# EAGLE board DualSerialHBridge-2.0 (EAGLE 6.4)
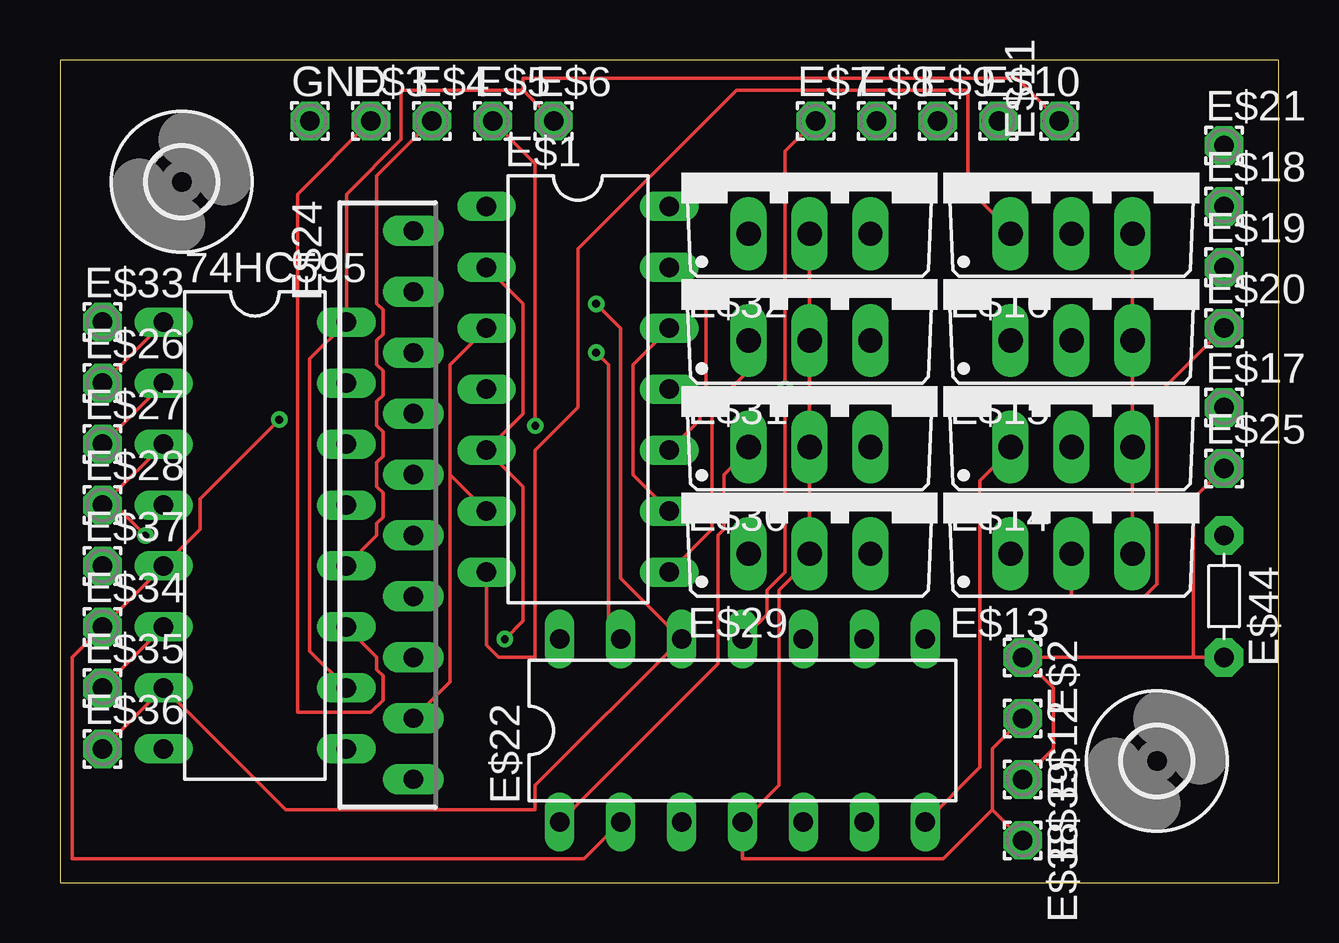
[diagram p0: board, top side]
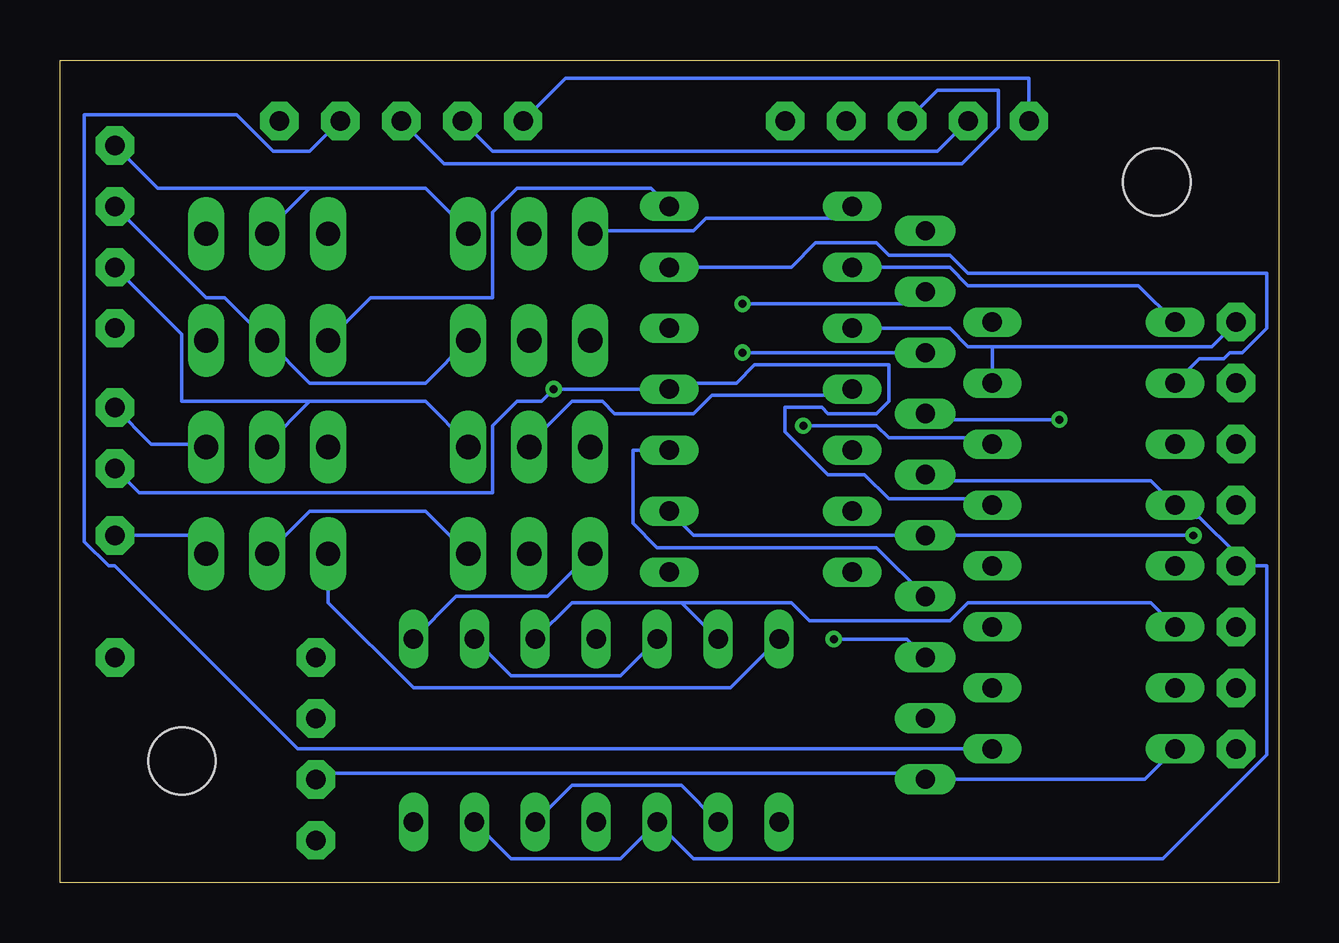
[diagram p1: board, bottom side, seen from below]

Size 50.8 x 34.29 mm. Coordinates in mm from the lower left corner, seen from the top.
Outline: 0,34.29 0,0 50.8,0 50.8,34.29 0,34.29
Copper layers (1*16): Top 0.0356mm / dielectric 1.5011mm / Bottom 0.0356mm
Design rules "LaenPCBOrder": minimum track width 6mil, minimum drill 13mil, track to track 6mil, track to pad 6mil, pad to pad 6mil, via to via 6mil, smd to smd 6mil, copper to edge 15mil, drill to drill 6mil, minimum pad ring 7mil, minimum via ring 7mil, stop-mask expansion 4mil, vias tented up to drill 0mil, thermal gap 10mil

## Footprints (pad centres in the part's own frame; a part is rotated, then mirrored left to right if it is on the bottom)
DIL16 = drill 0.813 long: 1 -8.89,-3.81; 2 -6.35,-3.81; 3 -3.81,-3.81; 4 -1.27,-3.81; 5 1.27,-3.81; 6 3.81,-3.81; 7 6.35,-3.81; 8 8.89,-3.81; 9 8.89,3.81; 10 6.35,3.81; 11 3.81,3.81; 12 1.27,3.81; 13 -1.27,3.81; 14 -3.81,3.81; 15 -6.35,3.81; 16 -8.89,3.81
DIL14 = drill 0.813 long: 1 -7.62,-3.81; 2 -5.08,-3.81; 3 -2.54,-3.81; 4 0,-3.81; 5 2.54,-3.81; 6 5.08,-3.81; 7 7.62,-3.81; 8 7.62,3.81; 9 5.08,3.81; 10 2.54,3.81; 11 0,3.81; 12 -2.54,3.81; 13 -5.08,3.81; 14 -7.62,3.81
1,6/0,8 = drill 0.813 pad 1.6 octagon: 1 0,0
TO220V = drill 1.016 long: 1 -2.54,-2.54; 2 0,-2.54; 3 2.54,-2.54
SIP-10 = drill 0.8 pad 1.27 long: 1 -11.43,0; 2 -8.89,0; 3 -6.35,0; 4 -3.81,0; 5 -1.27,0; 6 1.27,0; 7 3.81,0; 8 6.35,0; 9 8.89,0; 10 11.43,0
2,8 = hole 2.8: 0,0
R-5 = drill 0.813 pad 1.6 octagon: 1 -2.54,0; 2 2.54,0

## Placement (x,y rotation side)
74HC595  74HC595  [DIL16]  8.13,14.48 270 top
E$1  LM324  [DIL14]  21.59,20.57 270 top
E$2  [1,6/0,8]  40.13,9.4 270 top
E$3  [1,6/0,8]  12.95,31.75 0 top
E$4  [1,6/0,8]  15.49,31.75 0 top
E$5  [1,6/0,8]  18.03,31.75 0 top
E$6  [1,6/0,8]  20.57,31.75 0 top
E$7  [1,6/0,8]  31.5,31.75 0 top
E$8  [1,6/0,8]  34.04,31.75 0 top
E$9  [1,6/0,8]  36.58,31.75 0 top
E$10  [1,6/0,8]  39.12,31.75 0 top
E$11  [1,6/0,8]  41.66,31.75 90 top
E$12  [1,6/0,8]  40.13,6.86 270 top
E$13  [TO220V]  42.16,16.26 0 top
E$14  [TO220V]  42.16,20.7 0 top
E$15  [TO220V]  42.16,25.15 0 top
E$16  [TO220V]  42.16,29.59 0 top
E$17  [1,6/0,8]  48.51,19.81 0 top
E$18  [1,6/0,8]  48.51,28.19 0 top
E$19  [1,6/0,8]  48.51,25.65 0 top
E$20  [1,6/0,8]  48.51,23.11 0 top
E$21  [1,6/0,8]  48.51,30.73 0 top
E$22  LM324  [DIL14]  28.45,6.35 0 top
E$24  [SIP-10]  14.73,15.75 270 top
E$25  [1,6/0,8]  48.51,17.27 0 top
E$26  [1,6/0,8]  1.78,20.83 0 top
E$27  [1,6/0,8]  1.78,18.29 0 top
E$28  [1,6/0,8]  1.78,15.75 0 top
E$29  [TO220V]  31.24,16.26 0 top
E$30  [TO220V]  31.24,20.7 0 top
E$31  [TO220V]  31.24,25.15 0 top
E$32  [TO220V]  31.24,29.59 0 top
E$33  [1,6/0,8]  1.78,23.37 0 top
E$34  [1,6/0,8]  1.78,10.67 0 top
E$35  [1,6/0,8]  1.78,8.13 0 top
E$36  [1,6/0,8]  1.78,5.59 0 top
E$37  [1,6/0,8]  1.78,13.21 0 top
E$38  [1,6/0,8]  40.13,1.78 270 top
E$39  [1,6/0,8]  40.13,4.32 270 top
E$40  [2,8]  5.08,29.21 0 top
E$42  [2,8]  45.72,5.08 0 top
E$44  [R-5]  48.51,11.94 270 top
GND  [1,6/0,8]  10.41,31.75 0 top

## Library data of the parts
74HC595 = 74xx-us
E$1 E$22 = 40xx
E$2-E$12 E$17-E$21 E$25-E$28 E$33-E$39 GND = wirepad
E$13-E$16 E$29-E$32 = transistor-pnp
E$24 = linear
E$40 E$42 = holes
E$44 = discrete

## Nets
S$1: E$1.1 E$32.1
S$2: 74HC595.10 74HC595.16 E$6.1 E$11.1
S$3: 74HC595.11 E$3.1 E$8.1
S$4: 74HC595.12 E$4.1 E$9.1
S$5: 74HC595.14 E$5.1
S$6: E$1.4 E$12.1 E$22.4 E$29.2 E$30.2 E$31.2 E$32.2 E$38.1
S$7: E$1.7 E$16.1
S$8: E$1.8 E$31.1
S$9: E$1.14 E$15.1
S$10: E$22.1 E$30.1
S$11: 74HC595.15 E$1.3 E$1.6 E$24.9 E$33.1
S$12: 74HC595.8 74HC595.13 E$1.11 E$2.1 E$7.1 E$22.11 E$24.10 E$25.1 E$39.1 E$44.2 GND.1
S$13: E$14.1 E$22.7
S$14: E$22.8 E$29.1
S$15: E$13.1 E$22.14
S$16: 74HC595.1 E$1.2 E$1.5 E$24.8 E$26.1
S$17: 74HC595.2 E$1.10 E$1.13 E$24.7 E$27.1
S$18: 74HC595.3 E$1.9 E$1.12 E$24.6 E$28.1
S$19: 74HC595.4 E$22.3 E$22.6 E$24.5 E$37.1
S$20: 74HC595.5 E$22.2 E$22.5 E$24.4 E$34.1
S$21: 74HC595.6 E$22.10 E$22.13 E$24.3 E$35.1
S$22: 74HC595.9 E$10.1
S$23: 74HC595.7 E$22.9 E$22.12 E$24.2 E$36.1
S$24: E$13.3 E$14.3 E$15.3 E$16.3 E$17.1 E$44.1
S$25: E$16.2 E$21.1 E$32.3
S$26: E$15.2 E$18.1 E$31.3
S$27: E$14.2 E$19.1 E$30.3
S$28: E$13.2 E$20.1 E$29.3

## Tracks (layer width: path | path; a pad name or v marks a point on that pad's centre or on a via)
S$1
  Bottom 0.152: E$1.1 18.29,27.69 23.88,27.69 24.38,27.18 28.7,27.18 E$32.1
S$2
  Top 0.152: 74HC595.10 10.41,9.65 10.41,21.84 74HC595.16 11.94,28.7 14.22,30.99 14.22,33.02 19.3,33.02 | 19.3,33.02 E$6.1 | E$11.1 39.88,33.53 19.3,33.53 19.3,33.02
S$3
  Top 0.152: 74HC595.11 13.21,9.4 13.21,8.89 13.46,8.64 13.46,7.62 12.95,7.11 9.91,7.11 9.91,28.7 E$3.1
  Bottom 0.152: E$8.1 32.77,30.48 14.22,30.48 E$3.1
S$4
  Top 0.152: 74HC595.12 13.21,14.48 13.21,14.99 13.46,15.24 13.46,16.26 13.21,16.51 13.21,17.53 13.46,17.78 13.46,18.8 13.21,19.05 13.21,20.07 13.46,20.32 13.46,21.34 13.21,21.59 13.21,22.61 13.46,22.86 13.46,23.88 13.21,24.13 13.21,29.46 E$4.1
  Bottom 0.152: E$9.1 34.8,29.97 13.21,29.97 11.68,31.5 11.68,33.02 14.22,33.02 E$4.1
S$5  (via drill 0.33)
  Top 0.152: v19.81,19.05 19.81,29.97 E$5.1
  Bottom 0.152: 74HC595.14 12.19,18.54 16.26,18.54 16.76,19.05 v19.81,19.05
S$6
  Top 0.152: E$32.2 E$31.2 E$30.2 E$29.2 31.24,13.46 29.97,12.19 29.97,4.06 E$22.4 28.45,1.02 36.83,1.02 38.86,3.05 | 38.86,3.05 E$38.1 | 38.86,3.05 38.86,5.59 E$12.1
  Bottom 0.152: E$1.4 18.03,20.32 23.62,20.32 24.38,19.56 27.69,19.56 28.19,20.07 29.46,20.07 31.24,18.29 E$30.2
S$7
  Top 0.152: E$1.7 17.78,9.91 18.29,9.4 19.81,9.4 19.81,18.03 21.59,19.81 21.59,26.42 28.19,33.02 37.85,33.02 37.85,28.96 39.62,27.18 E$16.1
S$8
  Top 0.152: E$1.8 27.18,14.73 27.18,19.81 28.7,21.34 E$31.1
S$9
  Bottom 0.152: E$1.14 26.16,28.96 31.75,28.96 32.77,27.94 32.77,24.38 37.85,24.38 E$15.1
S$10
  Top 0.152: E$22.1 27.43,9.14 27.43,14.48 27.69,14.73 27.69,17.02 28.7,18.03 E$30.1
S$11
  Top 0.152: 16.26,17.02 E$1.6 | 16.26,17.02 16.26,21.59 E$1.3 | E$24.9 16.26,8.38 16.26,17.02
  Bottom 0.152: 11.94,22.35 74HC595.15 | 11.94,22.35 12.95,22.35 13.72,23.11 E$1.3 | E$33.1 2.79,22.35 11.94,22.35
S$12  (via drill 0.33)
  Top 0.152: E$22.11 29.46,11.18 29.46,12.19 30.23,12.95 v30.23,20.57 30.23,30.48 E$7.1 | E$39.1 41.4,5.59 41.4,8.13 E$2.1 47.24,9.4 | 47.24,9.4 E$44.2 | E$25.1 47.24,16 47.24,9.4
  Bottom 0.152: 74HC595.13 12.19,16 16.26,16 17.27,17.02 18.8,17.02 20.57,18.8 20.57,19.81 19.05,19.81 18.8,19.56 16.76,19.56 16.26,20.07 16.26,21.59 21.84,21.59 22.61,20.83 25.15,20.83 E$1.11 v30.23,20.57 30.73,20.07 31.75,20.07 32.77,19.05 32.77,16.26 47.5,16.26 E$25.1 | GND.1 10.41,33.53 29.72,33.53 E$7.1 | 74HC595.8 5.59,4.32 E$24.10 14.99,4.57 39.88,4.57 E$39.1
S$13
  Top 0.152: E$22.7 38.35,4.83 38.35,16.76 39.62,18.03 E$14.1
S$14
  Bottom 0.152: E$22.8 34.29,11.94 30.48,11.94 E$29.1
S$15
  Bottom 0.152: E$22.14 22.86,8.13 36.07,8.13 39.62,11.68 E$13.1
S$16  (via drill 0.33)
  Top 0.152: E$26.1 74HC595.1 | E$1.2 19.3,24.13 19.3,19.56 E$1.5 19.3,16.51 19.3,10.92 v18.54,10.16
  Bottom 0.152: E$24.8 15.49,10.16 v18.54,10.16 | 74HC595.1 5.84,24.89 12.95,24.89 13.72,25.65 E$1.2
S$17
  Top 0.152: E$27.1 74HC595.2 | E$1.10 26.67,19.3 26.67,19.81 26.92,20.07 26.92,24.13 E$1.13
  Bottom 0.152: E$24.7 16.76,13.97 25.91,13.97 26.92,14.99 26.92,18.03 E$1.10 | 74HC595.2 3.3,21.84 2.29,21.84 2.03,22.1 1.52,22.1 0.51,23.11 0.51,25.4 12.95,25.4 13.72,26.16 16.26,26.16 16.76,26.67 19.3,26.67 20.32,25.65 E$1.13
S$18  (via drill 0.33)
  Top 0.152: 2.03,16 74HC595.3 | E$1.12 23.88,21.59 23.88,17.02 E$1.9 | v3.56,14.48 2.03,16 | 2.03,16 E$28.1
  Bottom 0.152: E$1.9 24.38,14.48 E$24.6 v3.56,14.48
S$19
  Bottom 0.152: E$22.6 32,1.02 27.43,1.02 E$22.3 24.38,1.02 4.83,1.02 0.51,5.33 0.51,13.21 E$37.1 1.78,13.72 3.3,15.24 3.81,15.24 74HC595.4 5.33,16.76 14.48,16.76 E$24.5
S$20  (via drill 0.33)
  Top 0.152: v9.14,19.3 5.84,16 5.84,14.73 74HC595.5 E$34.1 0.51,9.4 0.51,1.02 21.84,1.02 E$22.2
  Bottom 0.152: E$22.2 24.89,4.06 29.46,4.06 E$22.5 | E$24.4 14.48,19.3 v9.14,19.3
S$21  (via drill 0.33)
  Top 0.152: E$35.1 74HC595.6 | v22.35,22.1 22.86,21.59 22.86,10.67 E$22.13
  Bottom 0.152: 24.89,11.68 E$22.13 | 24.89,11.68 29.46,11.68 E$22.10 | v22.35,22.1 E$24.3 | 74HC595.6 5.33,11.68 12.95,11.68 13.72,10.92 19.56,10.92 20.32,11.68 24.89,11.68
S$22
  Bottom 0.152: 74HC595.9 40.89,5.59 48.51,13.21 48.77,13.21 49.78,14.22 49.78,32 43.43,32 41.91,30.48 40.39,30.48 E$10.1
S$23  (via drill 0.33)
  Top 0.152: E$36.1 74HC595.7 9.4,3.05 19.81,3.05 19.81,4.06 E$22.12 23.37,12.7 23.37,23.11 v22.35,24.13
  Bottom 0.152: E$22.12 27.43,8.64 32,8.64 E$22.9 | E$24.2 15.24,24.13 v22.35,24.13
S$24
  Top 0.152: E$16.3 E$15.3 E$14.3 E$13.3
  Bottom 0.152: E$13.3 45.47,14.48 E$44.1 | E$17.1 46.99,18.29 44.7,18.29 E$14.3
S$25
  Bottom 0.152: 40.39,28.96 35.56,28.96 33.78,27.18 E$32.3 | 40.39,28.96 42.16,27.18 E$16.2 | E$21.1 46.74,28.96 40.39,28.96
S$26
  Bottom 0.152: E$31.3 35.56,20.83 40.39,20.83 E$15.2 43.94,24.38 44.7,24.38 E$18.1
S$27
  Bottom 0.152: 40.39,20.07 35.56,20.07 33.78,18.29 E$30.3 | 40.39,20.07 42.16,18.29 E$14.2 | E$19.1 45.72,22.86 45.72,20.07 40.39,20.07
S$28
  Top 0.152: E$20.1 45.72,20.32 45.72,12.45 45.21,11.94 42.16,11.94 E$13.2
  Bottom 0.152: E$29.3 35.56,15.49 40.39,15.49 E$13.2

## Text on the board
tNames: Serial In | Serial Out | REF | GND | SHCP | STCP | DSI | VCC | GND | SHCP | STCP | DSO | VCC | O1 | O2 | O3 | Power Out | H1 | O4 | L1 | H2 | S | Sense Out | L2 | H3 | Power | Shunt | L3 | GND | H4 | VDD | L4 | 1 | Parallel In | GND | Dual H-Bridge | Brent M. Spell | VDD